# EAGLE board ShieldBotones (EAGLE 9.6.2)
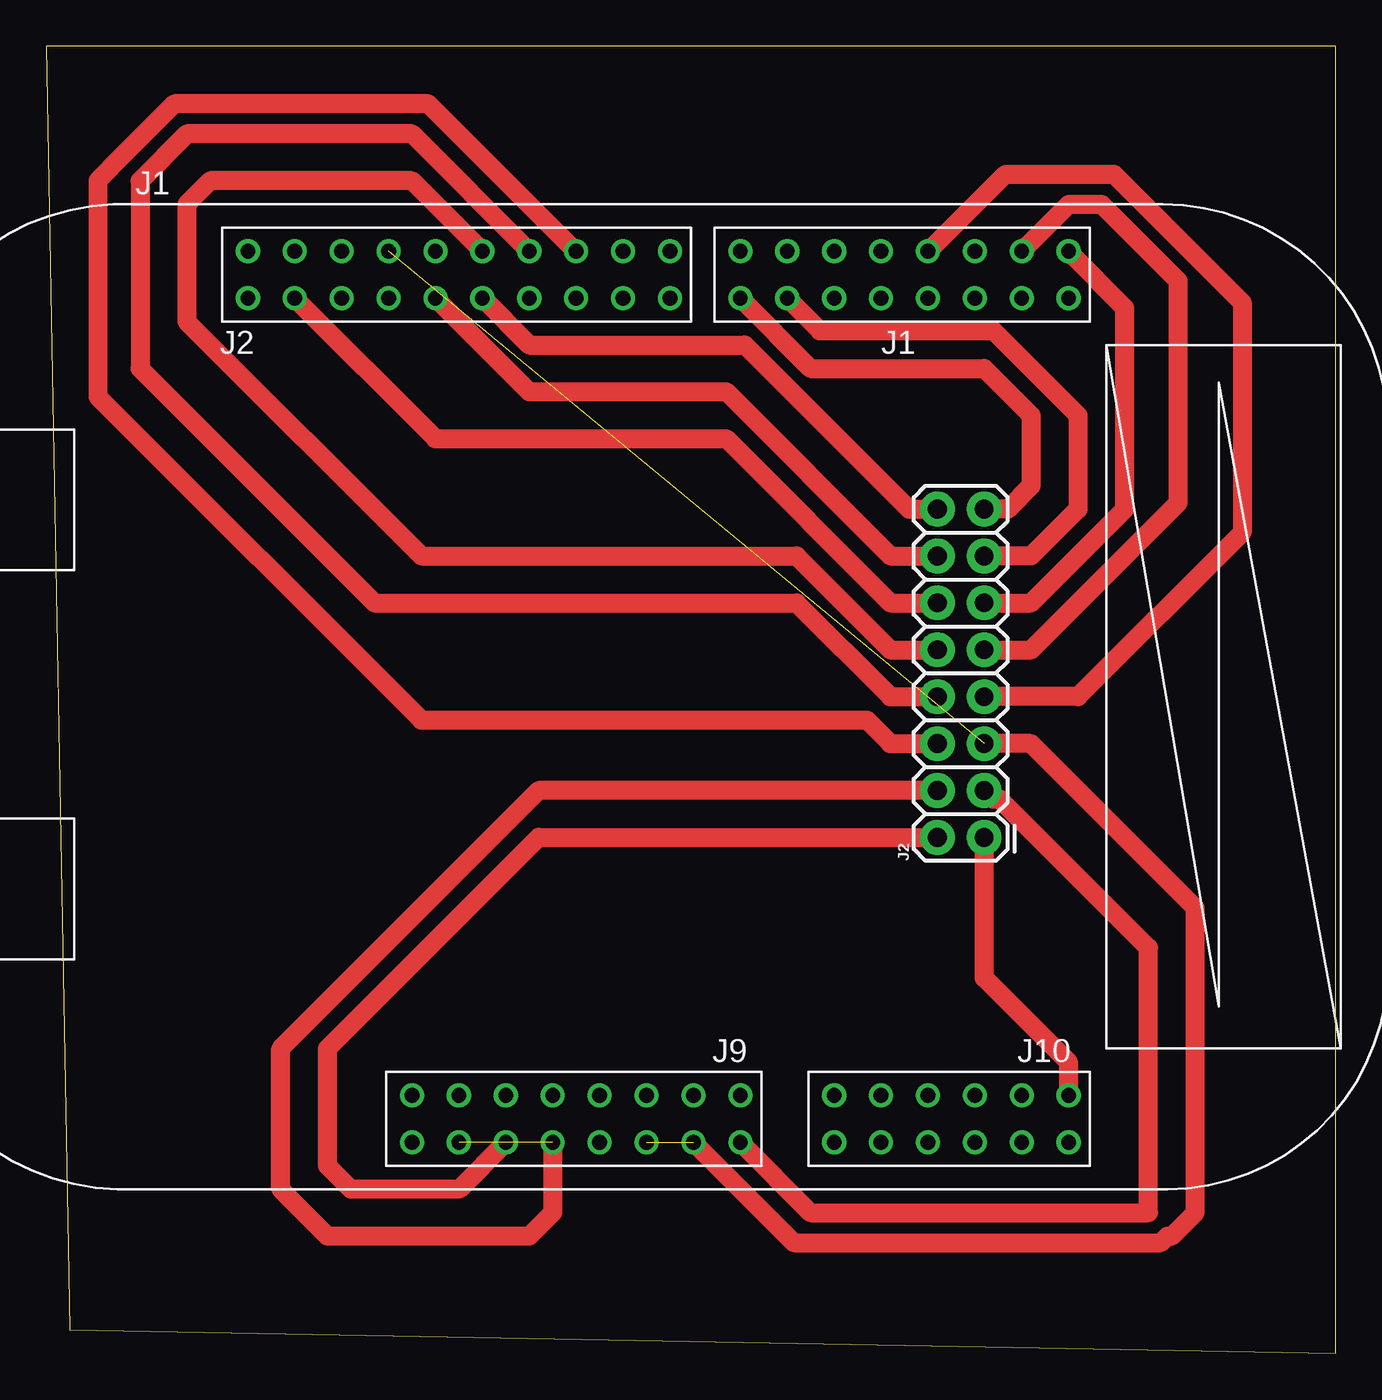
[diagram p0: board, top side]
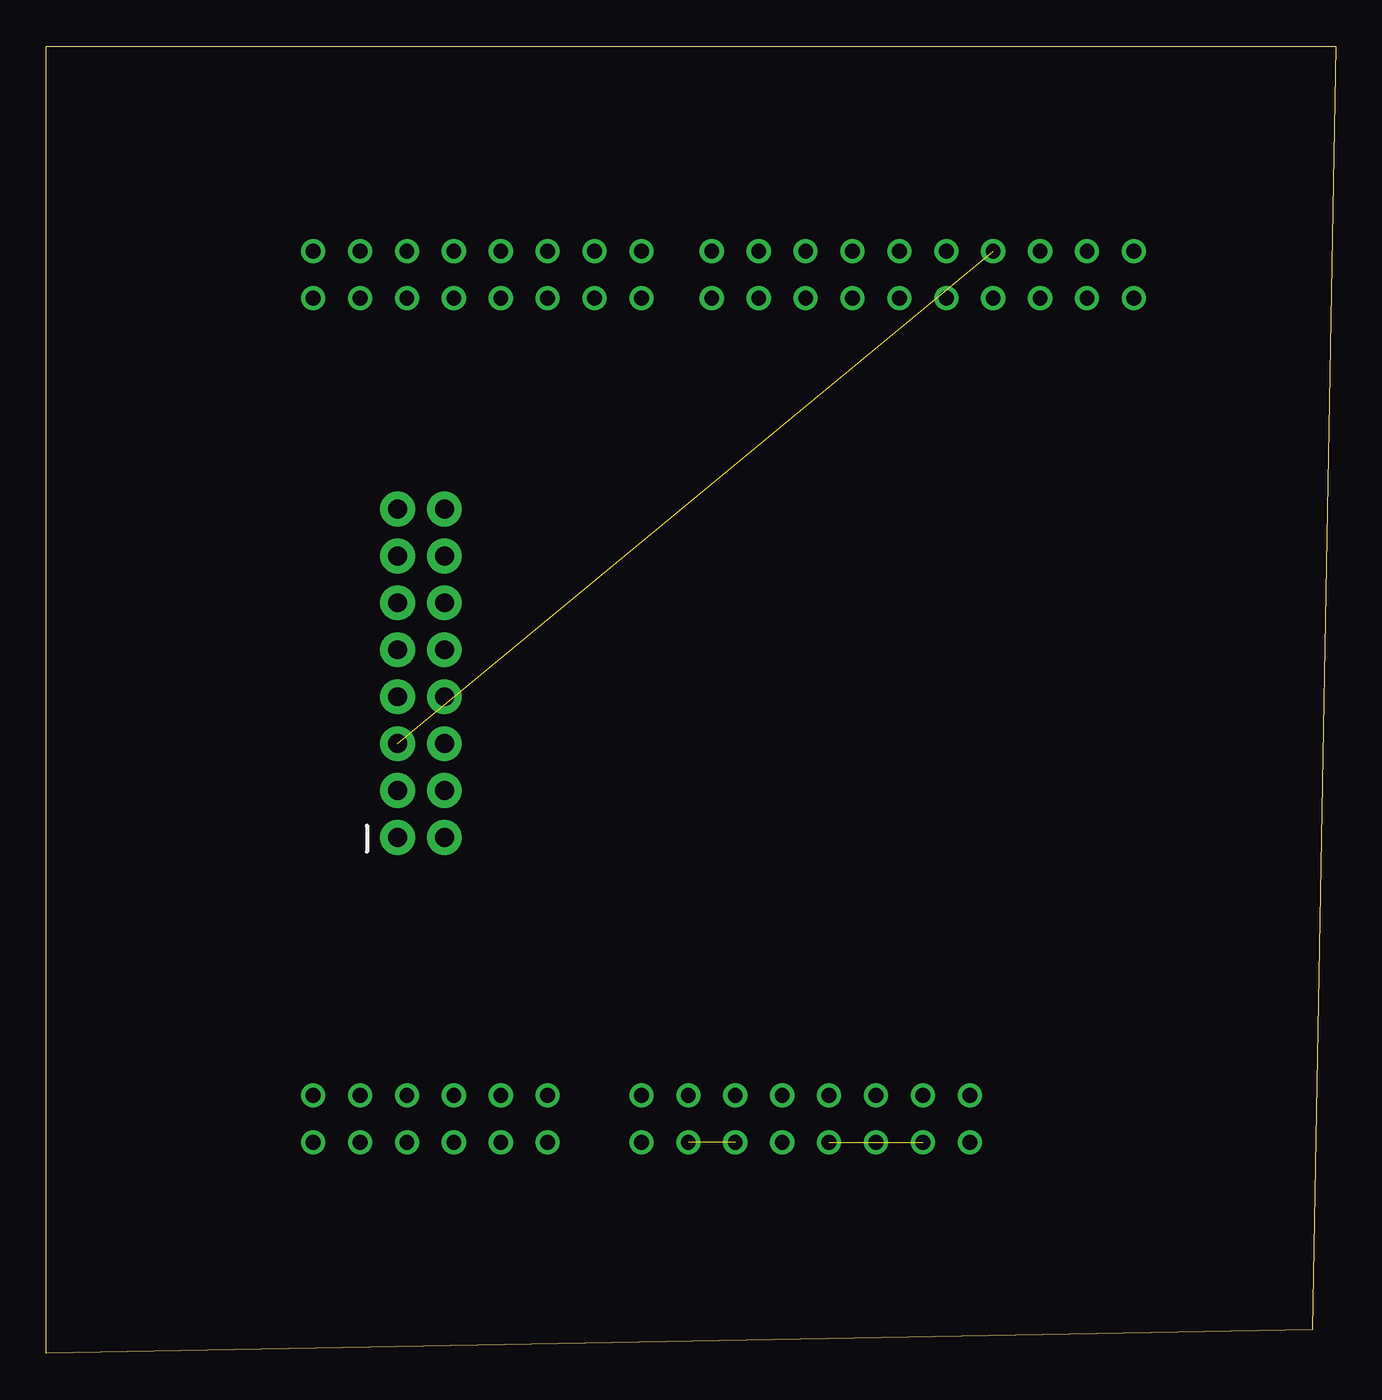
[diagram p1: board, bottom side, seen from below]

Size 69.83 x 70.79 mm. Coordinates in mm from the lower left corner, seen from the top.
Outline: 1.27,1.27 69.83,0 69.83,70.79 0,70.79 1.27,1.27
Copper layers (1*16): Top 0.035mm / dielectric 1.5mm / Bottom 0.035mm
Design rules "default": minimum track width 6mil, minimum drill 0.35mm, track to track 6mil, track to pad 6mil, pad to pad 6mil, via to via 6mil, smd to smd 6mil, copper to edge 40mil, drill to drill 6mil, minimum pad ring 10mil, minimum via ring 8mil, stop-mask expansion 4mil, vias tented up to drill 0mil, thermal gap 10mil
Net classes: 0 default: width 1.016 mm, drill 0.762 mm, clearance 0.61 mm

## Footprints (pad centres in the part's own frame; a part is rotated, then mirrored left to right if it is on the bottom)
FRDM-KL25Z = drill 0.8: J1-1 23.622,21.59; J1-2 23.622,24.13; J1-3 21.082,21.59; J1-4 21.082,24.13; J1-5 18.542,21.59; J1-6 18.542,24.13; J1-7 16.002,21.59; J1-8 16.002,24.13; J1-9 13.462,21.59; J1-10 13.462,24.13; J1-11 10.922,21.59; J1-12 10.922,24.13; J1-13 8.382,21.59; J1-14 8.382,24.13; J1-15 5.842,21.59; J1-16 5.842,24.13; J2-1 2.032,21.59; J2-2 2.032,24.13; J2-3 -0.508,21.59; J2-4 -0.508,24.13; J2-5 -3.048,21.59; J2-6 -3.048,24.13; J2-7 -5.588,21.59; J2-8 -5.588,24.13; J2-9 -8.128,21.59; J2-10 -8.128,24.13; J2-11 -10.668,21.59; J2-12 -10.668,24.13; J2-13 -13.208,21.59; J2-14 -13.208,24.13; J2-15 -15.748,21.59; J2-16 -15.748,24.13; J2-17 -18.288,21.59; J2-18 -18.288,24.13; J2-19 -20.828,21.59; J2-20 -20.828,24.13; J9-1 -11.938,-21.59; J9-2 -11.938,-24.13; J9-3 -9.398,-21.59; J9-4 -9.398,-24.13; J9-5 -6.858,-21.59; J9-6 -6.858,-24.13; J9-7 -4.318,-21.59; J9-8 -4.318,-24.13; J9-9 -1.778,-21.59; J9-10 -1.778,-24.13; J9-11 0.762,-21.59; J9-12 0.762,-24.13; J9-13 3.302,-21.59; J9-14 3.302,-24.13; J9-15 5.842,-21.59; J9-16 5.842,-24.13; J10-1 10.922,-21.59; J10-2 10.922,-24.13; J10-3 13.462,-21.59; J10-4 13.462,-24.13; J10-5 16.002,-21.59; J10-6 16.002,-24.13; J10-7 18.542,-21.59; J10-8 18.542,-24.13; J10-9 21.082,-21.59; J10-10 21.082,-24.13; J10-11 23.622,-21.59; J10-12 23.622,-24.13
2X8 = drill 1.016 pad 1.88: 1 0,0; 2 0,2.54; 3 2.54,0; 4 2.54,2.54; 5 5.08,0; 6 5.08,2.54; 7 7.62,0; 8 7.62,2.54; 9 10.16,0; 10 10.16,2.54; 11 12.7,0; 12 12.7,2.54; 13 15.24,0; 14 15.24,2.54; 15 17.78,0; 16 17.78,2.54

## Placement (x,y rotation side)
J1  FRDM-KL25Z  [FRDM-KL25Z]  31.75,35.56 0 top
J2  [2X8]  50.8,27.94 90 top

## Library data of the parts
J1 = FRDM-KL25Z; AVAILABILITY: In Stock; DESCRIPTION: KL1x, KL2x, mbed-Enabled Development Freedom Kinetis ARM® Cortex®-M0+ MCU 32-Bit Embedded Evaluation Board; MF: NXP USA; MP: FRDM-KL25Z; PACKAGE: None; PRICE: None; PURCHASE-URL: https://pricing.snapeda.com/search/part/FRDM-KL25Z/?ref=eda
J2 = SparkFun-Connectors

## Nets
3.3V: J1.J9-4 J1.J9-8 J2.4
BAT: J1.J2-9 J2.16
DAC: J1.J10-11 J2.1
ENCODER: J1.J1-8 J2.7
FRENO: J1.J2-17 J2.12
GND: J1.J2-14 J1.J9-12 J1.J9-14 J2.5
INDUCTIVO1: J1.J1-2 J2.11
INDUCTIVO2: J1.J1-4 J2.9
RESET: J1.J9-6 J2.2
SCL: J1.J1-13 J2.13
SDA: J1.J1-15 J2.15
TEMP: J1.J2-11 J2.14
VEL1: J1.J2-6 J2.6
VEL2: J1.J2-8 J2.8
VEL3: J1.J2-10 J2.10
VIN: J1.J9-16 J2.3

## Tracks (layer width: path | path; a pad name or v marks a point on that pad's centre or on a via)
3.3V  (1 unrouted)
  Top 1.016: J1.J9-8 27.43,7.62 26.16,6.35 15.24,6.35 12.7,8.89 12.7,16.51 26.67,30.48 J2.4
BAT
  Top 1.016: J1.J2-9 26.16,54.61 37.83,54.61 46.72,45.72 J2.16
DAC
  Top 1.016: J1.J10-11 55.37,15.75 50.8,20.32 J2.1
ENCODER
  Top 1.016: J1.J1-8 47.79,59.69 51.95,63.86 57.82,63.86 64.77,56.91 64.77,44.45 55.88,35.56 J2.7
FRENO
  Top 1.016: J1.J2-17 21.08,49.53 36.83,49.53 45.72,40.64 J2.12
GND  (2 unrouted)
  Top 1.016: J1.J9-14 40.49,5.99 60.36,5.99 60.72,6.35 60.96,6.35 62.23,7.62 62.23,24.13 53.34,33.02 J2.5
INDUCTIVO1
  Top 1.016: J1.J1-2 55.37,59.66 58.41,56.61 58.41,45.71 53.34,40.64 J2.11
INDUCTIVO2
  Top 1.016: J1.J1-4 55.37,62.23 57.15,62.23 61.31,58.07 61.31,46.07 53.34,38.1 J2.9
RESET
  Top 1.016: J1.J9-6 22.35,8.89 16.51,8.89 15.24,10.16 15.24,16.51 26.67,27.94 J2.2
SCL
  Top 1.016: J1.J1-13 41.9,55.38 51.3,55.38 55.88,50.8 55.88,45.72 53.34,43.18 J2.13
SDA
  Top 1.016: J1.J1-15 41.4,53.34 50.8,53.34 53.34,50.8 53.34,46.99 52.07,45.72 J2.15
TEMP
  Top 1.016: J1.J2-11 26.16,52.07 36.83,52.07 45.72,43.18 J2.14
VEL1
  Top 1.016: J1.J2-6 28.67,59.69 20.69,67.67 6.95,67.67 3.45,64.17 3.45,64.16 2.79,63.5 2.79,51.82 20.32,34.29 44.45,34.29 45.72,33.02 J2.6
VEL2
  Top 1.016: J1.J2-8 19.81,66.04 7.62,66.04 5.08,63.5 5.08,53.34 17.78,40.64 40.64,40.64 45.72,35.56 J2.8
VEL3
  Top 1.016: J1.J2-10 19.81,63.5 8.89,63.5 7.62,62.23 7.62,55.88 20.32,43.18 40.64,43.18 45.72,38.1 J2.10
VIN
  Top 1.016: J1.J9-16 41.4,7.62 59.69,7.62 59.69,21.96 51.65,30 51.28,30 J2.3